# Altium PCB PCB1.PcbDoc
Units mm, origin at the board's own origin, x right, y up, seen from the top; angles counter-clockwise.
Board outline 50 x 30 mm, 4 copper layers (Top Layer, Layer 1, Layer 2, Bottom Layer), stack 0.603 mm thick; 56 components, 43 nets, 273 pads, 167 vias.
Unrouted connection lines stored in the file: 3.
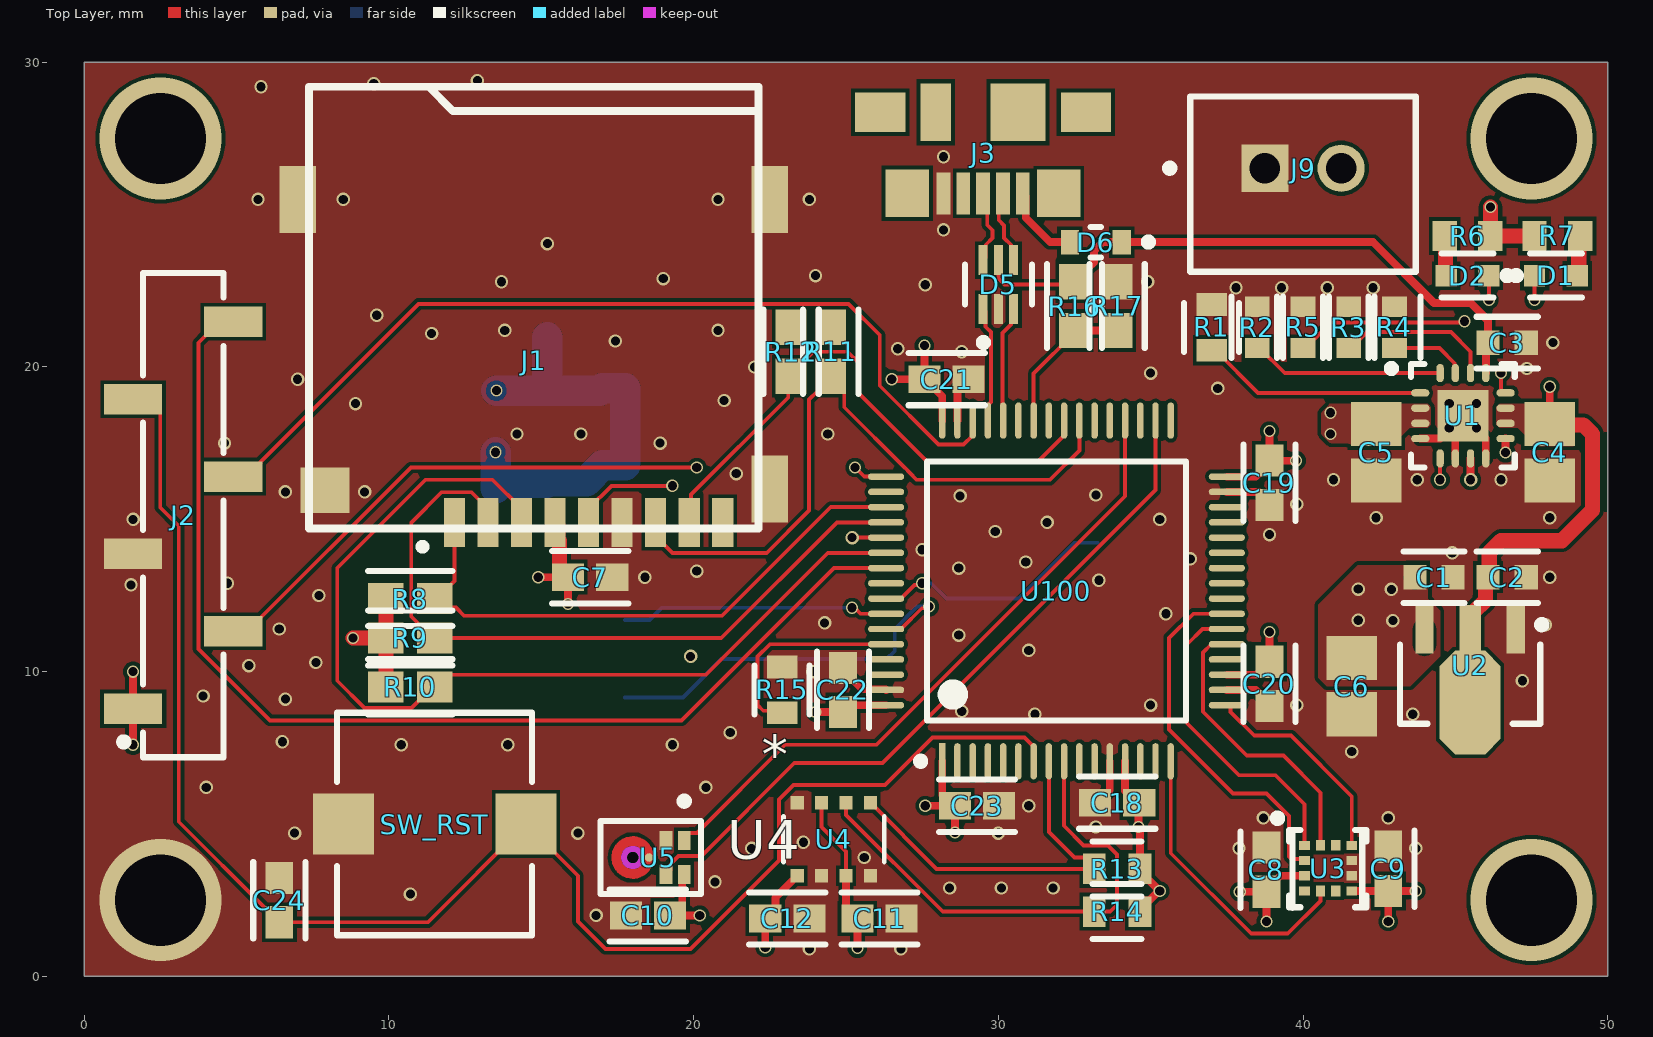
[diagram p0: Top Layer view]
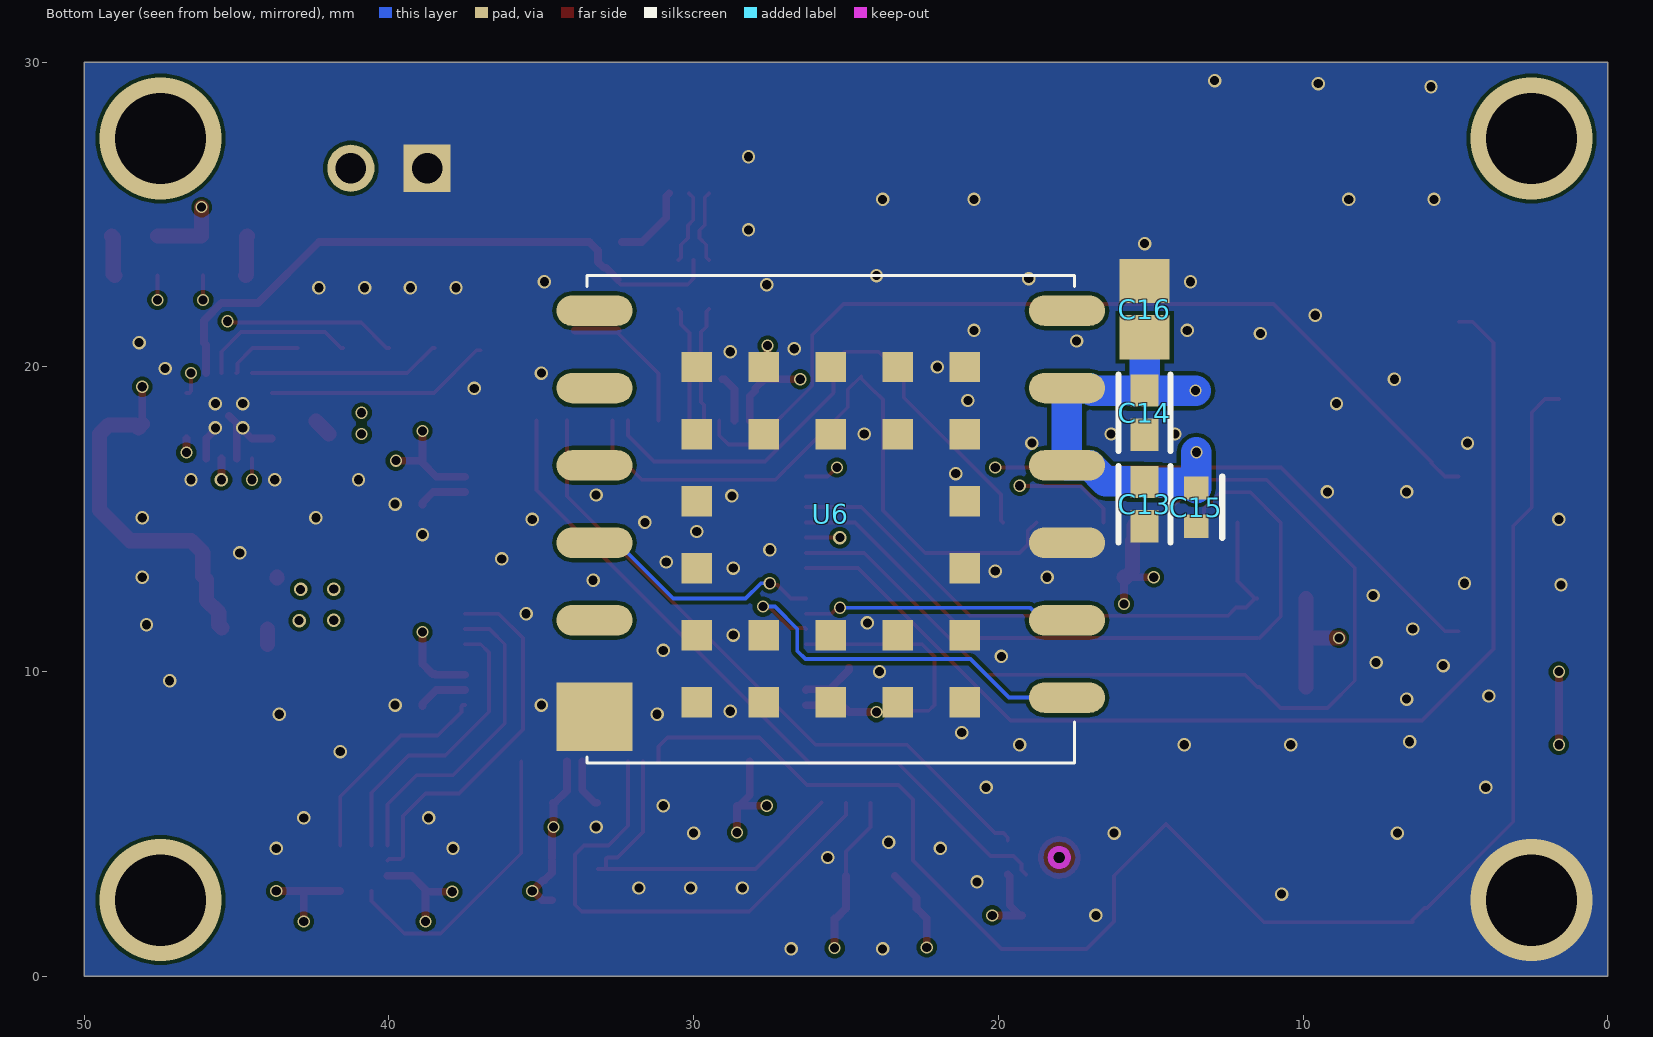
[diagram p1: Bottom Layer view, seen from below]
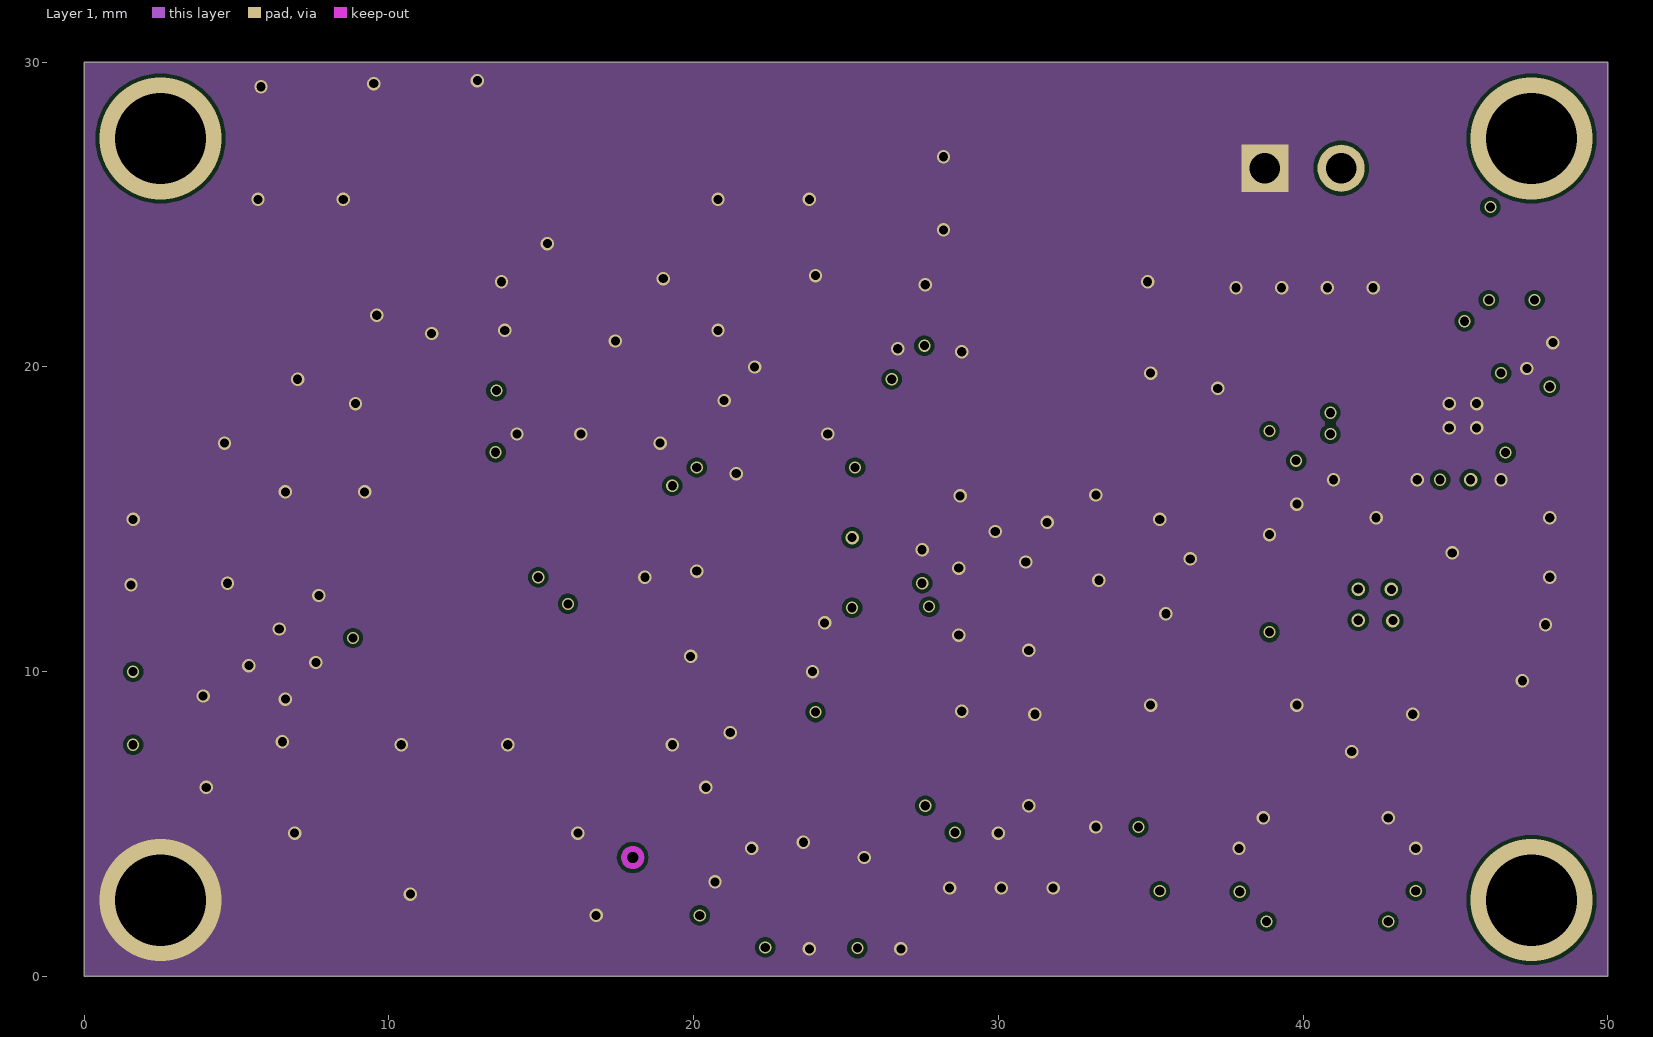
[diagram p2: Layer 1]
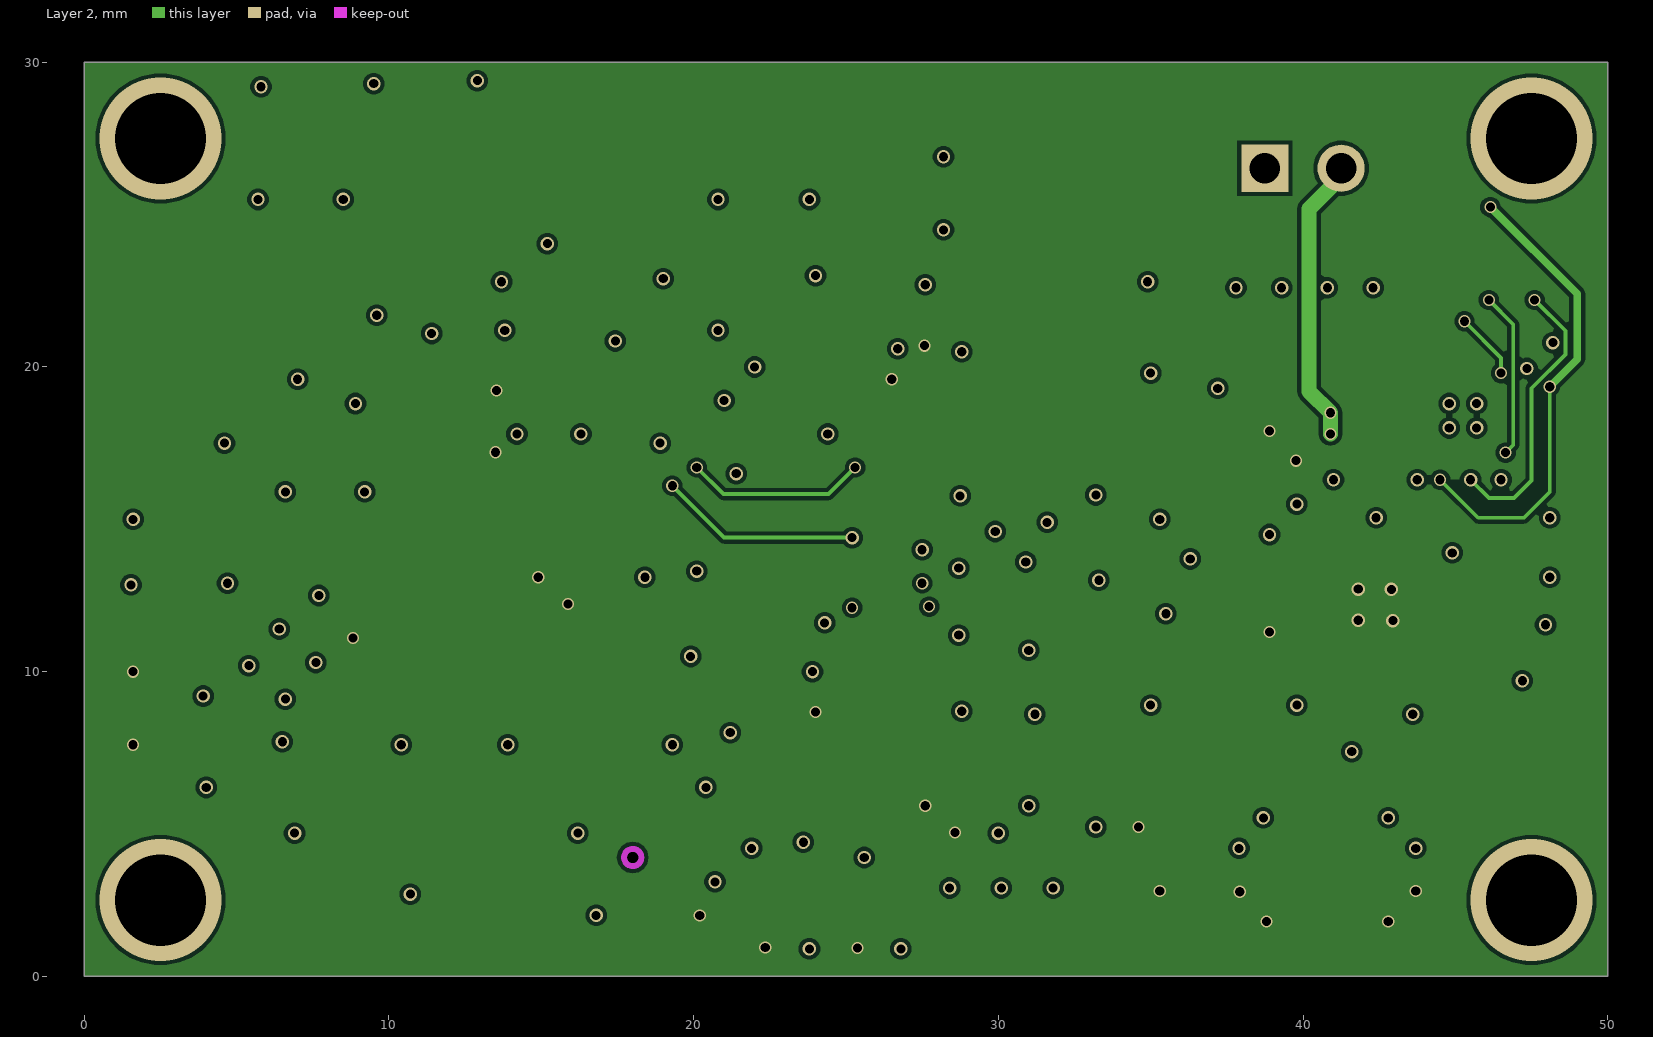
[diagram p3: Layer 2]
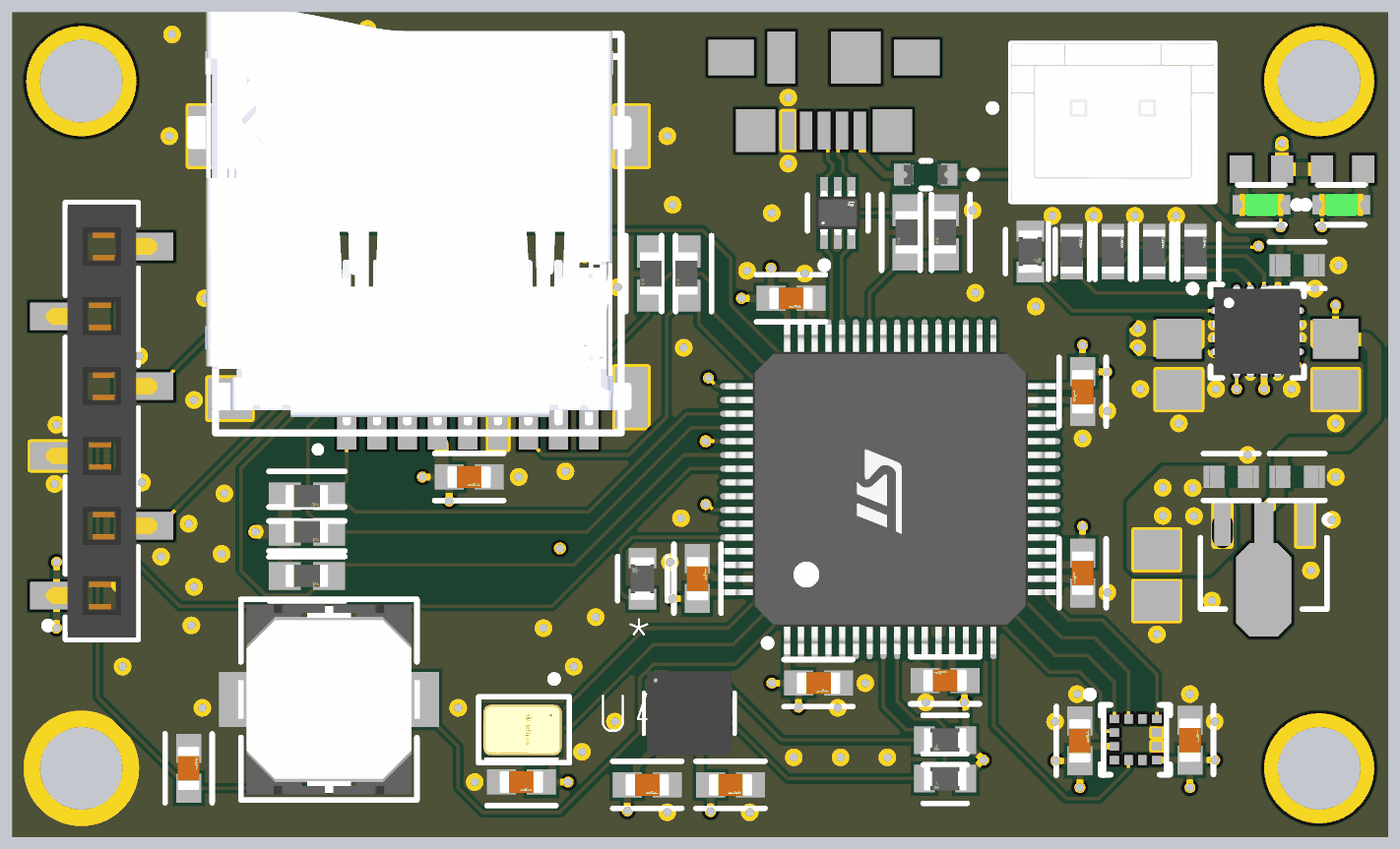
[diagram p4: 3D render of the assembled board from above, using the file's embedded part models]
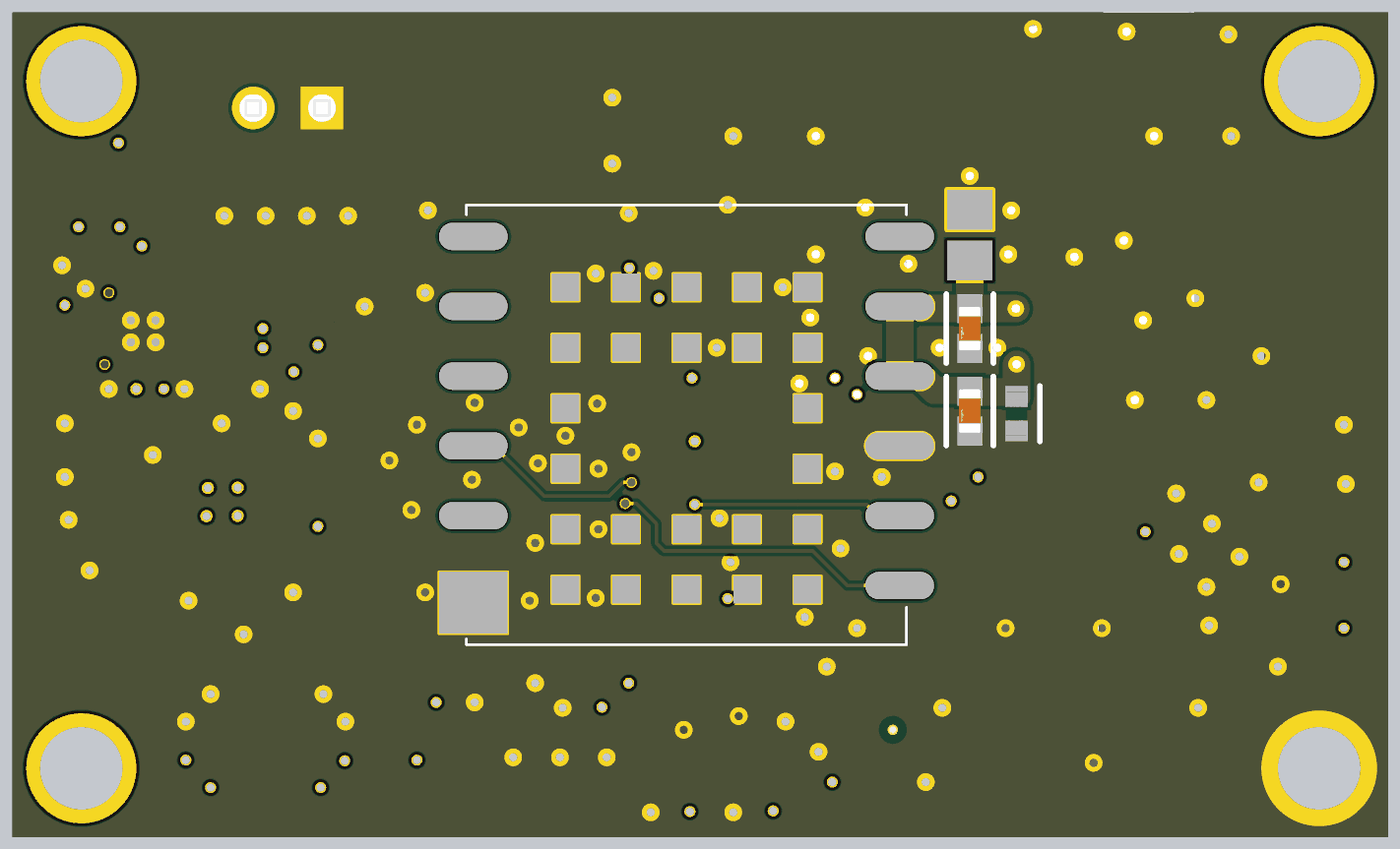
[diagram p5: 3D render of the assembled board from below, using the file's embedded part models]

## Layer stack, top to bottom
Top Solder: solder mask 0.0102, Solder Resist, Dk 3.5
Top Layer: signal copper 0.0356
Dielectric 2: prepreg 0.0711, PP-006, Dk 4.1
Layer 1: signal copper 0.035
Dielectric 1: dielectric 0.32, FR-4, Dk 4.8
Layer 2: signal copper 0.035
Dielectric 3: prepreg 0.0711, PP-006, Dk 4.1
Bottom Layer: signal copper 0.0356
Bottom Solder: solder mask 0.0102, Solder Resist, Dk 3.5

## Board outline
0,0 0,30 50,30 50,0

## Design rules (kind name [scope] priority, off if disabled: settings)
Clearance [All] p1: gap=0.127 ignorepadtopadclearanceinfootprint=TRUE except(0: SMDPad-SMDPad SMDPad-Via SMDPad-Hole)
ComponentClearance [All] p1 off: gap=0.254 collisioncheckmode=3 verticalgap=0.254 showdistances=FALSE
DiffPairsRouting [All] p1: maxlimit=0.254 minlimit=0.254 mostfreqgap=0.254 toplayer_minwidth=0.127 toplayer_maxwidth=0.381 toplayer_prefwidth=0.381 midlayer1_minwidth=0.381 midlayer1_maxwidth=0.381 midlayer1_prefwidth=0.381 midlayer2_minwidth=0.381 midlayer2_maxwidth=0.381 midlayer2_prefwidth=0.381 bottomlayer_minwidth=0.381 bottomlayer_maxwidth=0.381 bottomlayer_prefwidth=0.381 maxuncoupledlength=12.7
PlaneConnect [All] p1: planeconnectstyle=Direct reliefexpansion=0.508 reliefentries=4 reliefconductorwidth=0.254 reliefairgap=0.254
PolygonConnect [All] p1: connectstyle=Direct reliefconductorwidth=0.254 reliefentries=4 polygonreliefangle="90 Angle" airgapwidth=0.254
RoutingVias [All] p1: holewidth=0.3 width=0.4 viastyle="Through Hole" minholewidth=0.3 minwidth=0.4 maxholewidth=0.3 maxwidth=0.4
SolderMaskExpansion [All] p1: expansion=0.102 istentingtop=FALSE
SupplyNets "Schematic Supply Nets_4" [InNet('VBUS')] p1: voltage=0.000
SupplyNets "Schematic Supply Nets_3" [InNet('GND')] p2: voltage=0.000
SupplyNets "Schematic Supply Nets_2" [InNet('VBAT')] p3: voltage=0.000
SupplyNets "Schematic Supply Nets_1" [InNet('VCC')] p4: voltage=0.000
SupplyNets "Schematic Supply Nets" [InNet('+3.3V')] p5: voltage=0.000
Width [All] p1: maxlimit=1 minlimit=0.127 preferedwidth=0.254 minimp=50.000000 maximp=50.000000 favimp=50.000000
27 further rules are at their usual default settings.

## Classes and differential pairs
component class SENSORES: C8 C9 C10 C11 C12 C13 C14 C15 C16 R13 R14 U3 U4 U5 U6
component class CONTROL: C18 C19 C20 C21 C22 C23 C24 R15 SW_RST U100
component class CONECTORES: C7 D5 D6 J1 J2 J3 R8 R9 R10 R11 R12 R16 R17
component class ALIMENTACION: C1 C2 C3 C4 C5 C6 D1 D2 J9 R1 R2 R3 R4 R5 R6 R7 U1 U2
differential pair USB_PAR_TVS_USB: +NetD5_6 -NetD5_4
differential pair USB_PAR_MICRO_TVS: +NetD5_1 -NetD5_3

## Components (designator, comment, footprint, x,y, rotation, side; value= is the part's Value field where it differs from the comment)
C1 "1uF" FP-CL10-IPC_C 44.3,13.1 r0 top
C2 "1uF" FP-CL10-IPC_C 46.7,13.1 r0 top
C3 "1uF" FP-CL10-IPC_C 46.7,20.8 r0 top
C4 "4.7uF" CAPC2014X150X70ML20 48.1,17.2 r90 top
C5 "4.7uF" CAPC2014X150X70ML20 42.4,17.2 r90 top
C6 "4.7uF" CAPC2014X150X70ML20 41.6,9.525 r90 top
C7 "100nF" FP-GCG188-0_2-IPC_B 16.6,13.1 r0 top
C8 "100nF" FP-GCG188-0_2-IPC_B 38.8,3.5 r90 top
C9 "100nF" FP-GCG188-0_2-IPC_B 42.8,3.525 r90 top
C10 "100nF" FP-GCG188-0_2-IPC_B 18.5,2 r0 top
C11 "100nF" FP-GCG188-0_2-IPC_B 26.1,1.9 r0 top
C12 "100nF" FP-GCG188-0_2-IPC_B 23.075,1.9 r0 top
C13 "100nF" FP-GCG188-0_2-IPC_B 15.2,15.5 r270 bottom
C14 "100nF" FP-GCG188-0_2-IPC_B 15.2,18.5 r270 bottom
C15 "1uF" FP-CL10-IPC_C 13.5,15.4 r270 bottom
C16 "4.7uF" CAPC2014X150X70ML20 15.2,21.9 r270 bottom
C18 "100nF" FP-GCG188-0_2-IPC_B 33.9,5.7 r180 top
C19 "100nF" FP-GCG188-0_2-IPC_B 38.9,16.2 r270 top
C20 "100nF" FP-GCG188-0_2-IPC_B 38.9,9.6 r270 top
C21 "100nF" FP-GCG188-0_2-IPC_B 28.3,19.6 r0 top
C22 "100nF" FP-GCG188-0_2-IPC_B 24.9,9.4 r90 top
C23 "100nF" FP-GCG188-0_2-IPC_B 29.3,5.6 r0 top
C24 "100nF" FP-GCG188-0_2-IPC_B 6.4,2.5 r90 top
D1 "LSM0603453V" FP-LSM0603453V-MFG 48.3,23 r0 top
D2 "LSM0603453V" FP-LSM0603453V-MFG 45.4,23 r180 top
D5 "USBLC6-2P6" FP-SOT-666-MFG 30,22.705 r90 top
D6 "CD0603-B0240R" FP-CD0603-MFG 33.2,24.1 r180 top value=35pF
J1 "microSD_MSD4" ConnectorMicroSD_msd4 23.1,26.6 r180 top
J2 "61000611921" 61000611921 3.244,15.135 r90 top
J3 "USB" ConnectorMicroUSB 29.5,25.7 r180 top
J9 "B2B-XH-A(LF)(SN)" FP-B2B-XH-A_LF_SN-MFG 40,26 r0 top
R1 "10k" FP-CRCW0603-HPe3-MFG 37,21.3 r270 top
R2 "3.3k" FP-AC0603-IPC_C 38.5,21.3 r90 top
R3 "3.3k" FP-AC0603-IPC_C 41.5,21.3 r90 top
R4 "3.3k" FP-AC0603-IPC_C 43,21.3 r90 top
R5 "3.3k" FP-AC0603-IPC_C 40,21.3 r90 top
R6 "1.5k" RESC1608X55X25ML10T15 45.4,24.3 r180 top
R7 "1.5k" RESC1608X55X25ML10T15 48.35,24.3 r0 top
R8 "47k" FP-TFCR0603-IPC_A 10.7,12.4 r180 top
R9 "47k" FP-TFCR0603-IPC_A 10.7,11.106 r180 top
R10 "47k" FP-TFCR0603-IPC_A 10.7,9.5 r180 top
R11 "47k" FP-TFCR0603-IPC_A 24.5,20.5 r90 top
R12 "47k" FP-TFCR0603-IPC_A 23.2,20.5 r90 top
R13 "10k" FP-CRCW0603-HPe3-MFG 33.9,3.526 r180 top
R14 "10k" FP-CRCW0603-HPe3-MFG 33.9,2.126 r180 top
R15 "10k" FP-CRCW0603-HPe3-MFG 22.9,9.4 r90 top
R16 "47k" FP-TFCR0603-IPC_A 32.5,22 r90 top
R17 "47k" FP-TFCR0603-IPC_A 33.9,22 r90 top
SW_RST "B3AL-1003P" FP-B3AL-1003P-MFG 11.5,5 r0 top
U1 "BQ24232HA" QFN50P300X300X100_HS-17N 45.25,18.4 r0 top
U2 "MCP1703AT-3302E/MB" MCHP-SOT-89-MB3_M 45.486,9.739 r270 top
U3 "BMA400" LGA-12 40.05,4.3 r270 top
U4 "BME680" LGA8_BME680_BOS 24.6,4.5 r0 top
U5 "IM66D130MV01" IFX-PG-TLGA-5-8 18.845,3.9 r270 top
U6 "LC86G" LD86G 24.484,14.746 r0 bottom
U100 "STM32L476RGT3" FP-LQFP64-5W-IPC_C 31.909,12.65 r90 top

## Footprints (in the part's own frame and the unit in brackets; to place one, negate y for a bottom-side part, rotate by r counter-clockwise, add the part's x,y. Pads: shape width x height; smd on the part's side, far side on the other; paste and mask are expansions set on the pad)
61000611921 [mm] "Socket Header, Pitch 2.54 mm, SMT, Vertical, single row, 6p"
  rect 1x1.91 smd: 1(-6.35,1.645) 2(-3.81,-1.645) 3(-1.27,1.645) 4(1.27,-1.645) 5(3.81,1.645) 6(6.35,-1.645)
  silkscreen extent -7.95,-1.33 7.95,2.07, body extent -7.87,-2.03 7.87,2.02, height 7.5
CAPC2014X150X70ML20 [mm] "Chip Capacitor, 2-Leads, Body 2.00x1.35mm, IPC Low Density"
  rect 1.45x1.65 smd: 1(-0.925,0) 2(0.925,0)
  body extent -1.1,-0.77 1.1,0.77, height 1.5
ConnectorMicroSD_msd4 [mm]
  rect 0.7x1.6 smd: 1(10.95,11.7) 2(9.85,11.7) 3(8.75,11.7) 4(7.65,11.7) 5(6.55,11.7) 6(5.45,11.7) 7(4.35,11.7) 8(3.25,11.7) CD(2.15,11.7)
  rect 1.2x2.2 smd: GND(0.6,10.6) GND(0.6,1.1) GND(16.1,1.1)
  rect 1.6x1.5 smd: GND(15.2,10.65)
  silkscreen extent 0.98,-2.6 15.73,12.6, body extent 0.6,-3.42 16.75,11.62, height 1.8
ConnectorMicroUSB [mm]
  rect 0.45x1.38 smd: 1(-1.3,0) 2(-0.65,0) 3(0,0) 4(0.65,0) 5(1.3,0)
  rect 1.425x1.55 smd: S1(-2.488,0) S2(2.488,0)
  rect 1.65x1.3 smd: S3(-3.375,-2.66) S6(3.375,-2.66)
  rect 1.8x1.9 smd: S4(-1.15,-2.66)
  rect 1x1.9 smd: S5(1.55,-2.66)
FP-AC0603-IPC_C [mm]
  rect 0.659x0.812 smd paste+0 mask+0: 1(-0.677,0) 2(0.677,0)
  silkscreen extent -1.01,-0.85 1.01,0.85, body extent -1.11,-0.55 1.11,0.55, height 0.25
FP-B2B-XH-A_LF_SN-MFG [mm]
  rect 1.55x1.55 hole 1 paste-2539.97 mask+0: 1(-1.25,0.525)
  round 1.55 hole 1 paste-2539.97 mask+0: 2(1.25,0.525)
  silkscreen extent -4.5,-2.88 3.7,2.88, body extent -3.8,-2.98 3.8,2.98, height 0.25
FP-B3AL-1003P-MFG [mm]
  rect 2x2 smd paste+0 mask+0: 1(-3,0) 2(3,0)
  silkscreen extent -3.2,-3.65 3.2,3.65, body extent -4.1,-3.75 4.1,3.75, height 0.25
FP-CD0603-MFG [mm]
  rect 0.6x0.8 smd paste+0 mask+0: 1(-0.85,0) 2(0.85,0)
  silkscreen extent -1.85,-0.5 0.18,0.5, body extent -1.25,-0.6 1.25,0.6, height 0.25
FP-CL10-IPC_C [mm]
  rect 0.758x0.812 smd paste+0 mask+0: 1(-0.627,0) 2(0.627,0)
  silkscreen extent -1.01,-0.85 1.01,0.85, body extent -1.11,-0.55 1.11,0.55, height 0.25
FP-CRCW0603-HPe3-MFG [mm]
  rect 0.75x1 smd paste+0 mask+0: 1(-0.75,0) 2(0.75,0)
  silkscreen extent -0.8,-0.9 0.8,0.9, body extent -1.22,-0.6 1.22,0.6, height 0.25
FP-GCG188-0_2-IPC_B [mm]
  rect 1.055x0.912 smd paste+0 mask+0: 1(-0.725,0) 2(0.725,0)
  silkscreen extent -1.25,-0.86 1.25,0.86, body extent -1.5,-0.71 1.5,0.71, height 0.25
FP-LQFP64-5W-IPC_C [mm]
  rect 1.188x0.212 smd paste+0 mask+0: 1(-5.591,3.75)
  rrect100% 1.188x0.212 smd paste+0 mask+0: 2(-5.591,3.25) 3(-5.591,2.75) 4(-5.591,2.25) 5(-5.591,1.75) 6(-5.591,1.25) 7(-5.591,0.75) 8(-5.591,0.25) 9(-5.591,-0.25) 10(-5.591,-0.75) 11(-5.591,-1.25) 12(-5.591,-1.75) 13(-5.591,-2.25) 14(-5.591,-2.75) 15(-5.591,-3.25) 16(-5.591,-3.75) 33(5.591,-3.75) 34(5.591,-3.25) 35(5.591,-2.75) 36(5.591,-2.25) 37(5.591,-1.75) 38(5.591,-1.25) 39(5.591,-0.75) 40(5.591,-0.25) 41(5.591,0.25) 42(5.591,0.75) 43(5.591,1.25) 44(5.591,1.75) 45(5.591,2.25) 46(5.591,2.75) 47(5.591,3.25) 48(5.591,3.75)
  rrect100% 0.212x1.188 smd paste+0 mask+0: 17(-3.75,-5.591) 18(-3.25,-5.591) 19(-2.75,-5.591) 20(-2.25,-5.591) 21(-1.75,-5.591) 22(-1.25,-5.591) 23(-0.75,-5.591) 24(-0.25,-5.591) 25(0.25,-5.591) 26(0.75,-5.591) 27(1.25,-5.591) 28(1.75,-5.591) 29(2.25,-5.591) 30(2.75,-5.591) 31(3.25,-5.591) 32(3.75,-5.591) 49(3.75,5.591) 50(3.25,5.591) 51(2.75,5.591) 52(2.25,5.591) 53(1.75,5.591) 54(1.25,5.591) 55(0.75,5.591) 56(0.25,5.591) 57(-0.25,5.591) 58(-0.75,5.591) 59(-1.25,5.591) 60(-1.75,5.591) 61(-2.25,5.591) 62(-2.75,5.591) 63(-3.25,5.591) 64(-3.75,5.591)
  silkscreen extent -5.72,-4.25 4.25,4.58, body extent -6,-6 6,6, height 1.6
FP-LSM0603453V-MFG [mm]
  rect 0.7x0.7 smd paste+0 mask+0: 1(-0.7,0) 2(0.7,0)
  silkscreen extent -1.72,-0.72 0.85,0.72, body extent -1.15,-0.55 1.15,0.55, height 0.25
FP-SOT-666-MFG [mm]
  rect 0.99x0.3 smd paste+0 mask+0: 1(-0.805,0.5) 2(-0.805,0) 3(-0.805,-0.5) 4(0.805,-0.5) 5(0.805,0) 6(0.805,0.5)
  silkscreen extent -2.02,-1.1 0.65,1.1, body extent -1.4,-0.95 1.4,0.95, height 0.25
FP-TFCR0603-IPC_A [mm]
  rect 1.158x1.012 smd paste+0 mask+0: 1(-0.802,0) 2(0.802,0)
  silkscreen extent -1.38,-0.91 1.38,0.91, body extent -1.88,-1.01 1.88,1.01, height 0.25
IFX-PG-TLGA-5-8 [mm] "Microphone, SMD, 5 pin, 2.00 mm L X 3.00 mm W X 1.06 mm H body"
  rect 0.625x0.42 smd paste-0.21 mask+0: 1(-0.555,0.845) 2(-0.555,0.245) 4(0.555,0.245) 5(0.555,0.845)
  round 0.28 smd paste-0.14 mask-0.14: 3(0,-0.31)
  round 0 hole 0.375 unplated paste-2539.97 mask+0: ""(0,-0.845)
  Top Layer circle w0.32: c0,-0.845 r0.54
  Keep-Out Layer circle w0.192: c0,-0.845 r0.284
  silkscreen extent -1.97,-1.9 1.2,1.4, body extent -1,-1.8 1,1.2, height 1.06
LD86G [mm]
  oval 2.5x1 smd mask+0.05: 1(-6.734,5.596) 2(-6.734,3.056) 3(-6.734,0.516) 4(-6.734,-2.024) 5(-6.734,-4.564) 6(-6.734,-7.104) 7(8.766,-7.104) 8(8.766,-4.564) 9(8.766,-2.024) 10(8.766,0.516) 11(8.766,3.056)
  rect 2.5x2.25 smd mask+0.05: 12(8.766,6.221)
  rect 1x1 smd mask+0.05: 13(-3.384,5.746) 14(-1.184,5.746) 15(1.016,5.746) 16(3.216,5.746) 17(5.416,5.746) 18(-3.384,3.546) 19(-1.184,3.546) 20(1.016,3.546) 21(3.216,3.546) 22(5.416,3.546) 23(-3.384,1.346) 24(5.416,1.346) 25(-3.384,-0.854) 26(5.416,-0.854) 27(-3.384,-3.054) 28(-1.184,-3.054) 29(1.016,-3.054) 30(3.216,-3.054) 31(5.416,-3.054) 32(-3.384,-5.254) 33(-1.184,-5.254) 34(1.016,-5.254) 35(3.216,-5.254) 36(5.416,-5.254)
  silkscreen extent -6.98,-8.25 9.02,7.75, body extent -6.98,-8.25 9.02,7.75, height 6.98
LGA8_BME680_BOS [mil]
  rect 17x17 smd paste+0 mask+0: 1(-47.21,47.24) 2(-15.75,47.21) 3(15.75,47.21) 4(47.21,47.24) 5(47.21,-47.24) 6(15.75,-47.21) 7(-15.75,-47.21) 8(-47.21,-47.24)
  silkscreen extent -65,-30 65,30, body extent -60,-60 60,60, height 39
LGA-12 [mm]
  rect 0.3x0.35 smd: 1(0,0) 2(0.5,0) 3(1,0) 4(1.5,0) 7(1.5,1.55) 8(1,1.55) 9(0.5,1.55) 10(0,1.55)
  rect 0.35x0.3 smd: 5(1.5,0.525) 6(1.5,1.025) 11(0,1.025) 12(0,0.525)
  silkscreen extent -1.02,-1.02 2.03,2.03, body extent -0.28,-0.28 1.78,1.83
MCHP-SOT-89-MB3_M [mm] "SOT89, 3-Leads, Body 4.5x2.45mm, Pitch 1.5mm, IPC Low Density"
  rect 1.6x0.6 smd: 1(-1.65,1.5) 3(-1.65,-1.5)
  rect 1.5x0.7 smd: 2(-1.7,0)
  oct 3.4x2 smd: 4(0.75,0)
  silkscreen extent -1.93,-2.3 1.45,2.48, body extent -1.15,-2.3 1.45,2.3, height 1.6
QFN50P300X300X100_HS-17N [mm] "QFN, 16-Leads, Body 3,00x3,00mm, Pitch 0,50mm, Thermal Pad 1,68x1,68mm, IPC Medium Density"
  oval 0.6x0.24 smd: 1(-1.4,0.75) 2(-1.4,0.25) 3(-1.4,-0.25) 4(-1.4,-0.75) 9(1.4,-0.75) 10(1.4,-0.25) 11(1.4,0.25) 12(1.4,0.75)
  oval 0.24x0.6 smd: 5(-0.75,-1.4) 6(-0.25,-1.4) 7(0.25,-1.4) 8(0.75,-1.4) 13(0.75,1.4) 14(0.25,1.4) 15(-0.25,1.4) 16(-0.75,1.4)
  rect 1.68x1.68 smd: 17(0,0)
  silkscreen extent -2.47,-1.7 1.7,1.7, body extent -1.6,-1.6 1.6,1.6, height 1
RESC1608X55X25ML10T15 [mm] "Chip Resistor, 2-Leads, Body 1.60x0.80mm, IPC Low Density"
  rect 0.8x1 smd: 1(-0.75,0) 2(0.75,0)
  body extent -0.85,-0.45 0.85,0.45, height 0.55

## Part data
C1 C2 C3 C15: library part CMP-13271-002188-1, "Cap Ceramic 1uF 16V X7R ±10% Pad SMD 0603 +125°C T/R", Case Code (Imperial)=0603, Case Code (Metric)=1608, Dielectric=X7R, Max Operating Temperature=125°C, Min Operating Temperature=-55°C, Ratings=AEC-Q200, Tolerance=10%, Voltage Rating=16V, Capacitance=1uF, Case/Package=0603, Depth=0.8mm, Features="Soft Termination", Lead Free="Lead Free", Length=0.063inch, Mount="Surface Mount", Packaging="Tape and Reel", Thickness=0.035inch, Width=0.031inch
C4 C5 C6 C16: library part CMP-2007-00037-1, Manufacturer="AVX Interconnect / Elco", Part Number=TACR475M010RTA
C7 C8 C9 C10 C11 C12 C13 C14 C18 C19 C20 C21 C22 C23 C24: library part CMP-06035-011350-1, "AgPd Termination Conductive Glue Mounting Chip Multilayer Ceramic Capacitors for Automotive 0.1uF with 20% as tolerance, 50V X8R 15%, 0603 Package"
D1 D2: library part CMP-00731-94024739-1, "LSM0603453V LED SM 0603 3V -/1000/-mcd Green", Case/Package=0603, Color=Green, Forward Current=20mA, Forward Voltage=2.3V, Max Operating Temperature=85°C, Min Operating Temperature=-40°C, Power Dissipation=60mW, Reverse Voltage=5V, Height=550µm, Luminous Intensity=120mcd, NexarPartId=94024739, Schedule B="8541402000, 8541406050", Viewing Angle=120°, Wavelength=576nm
D5: library part CMP-12225-000058-1, "TVS DIODE 5.25V 17V SOT666", Breakdown Voltage=6V, Capacitance=3.5pF, Case/Package=SOT-666, Clamping Voltage=17V, Leakage Current=150nA, Max Operating Temperature=125°C, Min Operating Temperature=-40°C, Operating Supply Voltage=5V, Package Quantity=1, Peak Pulse Current=5A, Power Line Protection=Yes, Test Current=1mA, Contact Plating=Tin, Depth=1.3mm, Direction=Unidirectional, Element Configuration=Dual, ESD Protection=Yes, Height=0.6mm, Lead Free="Lead Free", Length=1.7mm, Max Breakdown Voltage=6V, Max Reverse Leakage Current=150nA, Min Breakdown Voltage=6V, Mount="Surface Mount", Number of Bidirectional Channels=2, Number of Channels=2, Number of Elements=1, Number of Pins=6, Packaging="Tape and Reel", Polarity=Unidirectional, Radiation Hardening=No, REACH SVHC="No SVHC", Reverse Breakdown Voltage=6V, Reverse Standoff Voltage=5V, Termination=SMD/SMT, Width=1.3mm, Working Voltage=5V
D6: library part CMP-07363-000001-1, "DIODE SCHOTTKY 40V 200MA 0603", Capacitance=35pF, Forward Current=200mA, Manufacturer=Bourns, Max Junction Temp=+125°C, Max Repetitive Reverse Voltage=40V, Max Surge Forward Current=2A, Package=CD0603, Peak Reverse Current=0.5uA, Temperature="-40°C to +125°C", Temperature Range Low=-40°C, Automotive=No, Category=Diode, ComponentLink2Description=Datasheet, ComponentLink2URL=https://bourns.com/data/global/pdfs/CD0603-B.pdf, Device Class L1="Discrete Semiconductors", Device Class L2=Diodes, Device Class L3="Schottky Diodes", Digikey Description="DIODE SCHOTTKY 40V 200MA 0603", Height=0.86mm, Lead Free=Yes, Manufacturer Part Number=CD0603-B0240R, Mouser Description="Diode Small Signal Schottky 40V 0.2A Automotive 2-Pin Case 0603(1608Metric) T/R", Octopart=https://octopart.com/cd0603-b0240r-bourns-87497736, RoHS=TRUE, Standoff Height=0.03mm, Temperature Range High=+125°C
J2: library part CMP-1502-01270-4, "SMT Vertical Socket Header WR-PHD, Pitch 2.54 mm, Single Row, 6 pins", Contact Resistance=20mΩ, Current Rating=3A, Operating Supply Voltage=250V, Gender=Female, Lead Pitch=2.54mm, Number of Pins=6, Orientation=Vertical, RoHS=Non-Compliant
J9: library part CMP-2000-05888-3, "CONN HEADER VERT 2POS 2.5MM", Color=Natural, Contact Resistance=20mR, Current Rating=3A, Housing Color=White, Insulation Resistance=1GR, Max Operating Temperature=85°C, Max Voltage Rating (AC)=250V, Min Operating Temperature=-25°C, Connector Type="Male Pin", Contact Material=Brass, Contact Plating=Tin, Contact Type="Male Pin", Depth=5.75mm, Fastening Type=Detent, Housing Material=Polyamide, Lead Free="Lead Free", Lead Pitch=2.5mm, Length=7.4mm, Max Current Rating=3A, Max Voltage Rating (DC)=250V, Mount="Through Hole", Number of Contacts=2, Number of Positions=2, Number of Rows=1, Orientation=Straight, Packaging=Bulk, Pitch=2.5mm, REACH SVHC="No SVHC", Series=XH, Termination=Solder, Voltage Rating=250V, Voltage Rating (AC)=250V, Wire/Cable Gauge=22AWG
R1 R13 R14 R15: library part CMP-2000-03835-2, "RES SMD 10K OHM 1% 1/3W 0603", Case Code (Imperial)=0603, Case Code (Metric)=1608, Max Operating Temperature=155°C, Max Power Dissipation=250mW, Min Operating Temperature=-55°C, Package Quantity=10, Resistance=10kR, Temperature Coefficient=100ppm/°C, Tolerance=1%, Voltage Rating=75V, Case/Package=0603, Composition="Thick Film", Contact Plating=Tin, Depth=0.85mm, Features="Automotive AEC-Q200", Height=0.45mm, Lead Free="Lead Free", Length=1.6mm, Military Standard=Not, Number of Terminations=2, Packaging="Tape and Reel", Power Rating=250mW, Radiation Hardening=No, Termination=SMD/SMT, Voltage Rating (DC)=75V, Weight=7.1E-05oz, Width=0.033inch
R2 R3 R4 R5: library part CMP-03412-041670-1, "RES 3.3kΩ 1.00% 0.2W 0603", RoHS Compliant=Yes
R6 R7: library part CMP-2000-04319-1, Manufacturer=Yageo, Part Number=RC0603JR-131K5L
R8 R9 R10 R11 R12 R16 R17: library part CMP-250906-272076-1, "RES Thin Film,  47kΩ, 1%, 0.1W, 100ppm/°C, 0603"
SW_RST: library part CMP-08834-000018-1, "SWITCH TACTILE SPST-NO 0.05A 16V", Actuator Color=White, Contact Current Rating=50mA, Contact Resistance=100mR, Max Operating Temperature=90°C, Max Voltage Rating (DC)=16V, Min Operating Temperature=-40°C, Operating Force=3.5N, Package Quantity=1, Contact Plating=Silver, Current Rating=50mA, Depth=6.6mm, Electrical Life=1000000Cycles, Illumination Type=Non-Illuminated, Length=6.9mm, Max Current Rating=50mA, Mechanical Life=1000000Cycles, Mount="Surface Mount", Orientation=Straight, Packaging="Tape and Reel", Radiation Hardening=No, RoHS Compliant=Yes, Series=B3AL, Switch Function=Off-Mom, Switch Travel=1.3mm, Termination=SMD/SMT, Throw Configuration=SPST, Voltage Rating (DC)=16V, Weight=0.18g
U1: "USB-Friendly Lithium-Ion Battery Charger and Power-Path Management IC", ComponentLink1Description="New link", ComponentLink1URL=https://www.mouser.es/ProductDetail/Texas-Instruments/BQ24232HARGTR?qs=zEmsApcVOkUhMNqBs2s9Ww%3D%3D
U2: library part CMP-0136-01169-1, "250 mA, 16V, Low Quiescent Current LDO Regulator, -40 to 125 degC, 3-pin SOT-89 (MB3), Tape and Reel", Manufacturer=Microchip, ComponentLink1Description="Manufacturer URL", ComponentLink1URL=http://www.microchip.com, ComponentLink2Description=Datasheet, ComponentLink2URL=http://ww1.microchip.com/downloads/en/DeviceDoc/25122A.pdf, ComponentLink3Description="Package Specification", ComponentLink3URL=http://www.microchip.com/stellent/groups/techpub_sg/documents/packagingspec/en012702.pdf, ComponentLink4Description="Product URL", ComponentLink4URL=http://www.microchip.com/MCP1703A, DatasheetVersion="Rev. A", Mounting Technology="Surface Mount", PackageDescription="3-Lead Plastic Small Outline Transistor Header, 4.5 x 2.45 mm Body, 1.5 mm Pitch", PackageReference=SOT-89-MB3, PackageVersion=C04-029B, PartNumber=MCP1703AT-3302E/MB
U4: "Description", Manufacturer_Name="Bosch Sensortec", Copyright="Copyright (C) 2025 Ultra Librarian. All rights reserved.", Manufacturer_Part_Number=BME680, RefDes=RefDes, Type=Type
U100: library part CMP-12105-000133-1, "IC MCU 32BIT 1MB FLASH 64LQFP", Case/Package=LQFP, Frequency=80MHz, Max Operating Temperature=125°C, Min Operating Temperature=-40°C, Core Architecture=ARM, Interface=I2C, Memory Size=1MB, Memory Type=FLASH, Number of I/Os=51, Oscillator Type=Internal, Packaging=Tray, Peripherals="Brown-out Detect/Reset"

## Via types
v1: diameter 0.44, hole 0.3, Top Layer to Bottom Layer, 123 vias
v2: diameter 0.4, hole 0.3, Top Layer to Bottom Layer, 40 vias
v3: diameter 4, hole 3, Top Layer to Bottom Layer, 4 vias

## Nets (pads, with @x,y where several pads share a name; then routed paths per layer and width w, separated by ;. In a path a pad name is that pad's centre, name@x,y a point inside that pad or via, vN(x,y) a via of type N, cw(c..) or ccw(c..) an arc to the next point about the centre after c; other vN are vias at no path point)
+3.3V: C1.1 C6.2 C7.1 C8.1 C9.1 C10.2 C11.1 C12.1 C13.1 C14.1 C15.1 C16.2 C18.1 C19.1 C20.1 C21.1 C22.1 C23.1 J1.4 J2.1 R8.2 R9.2 R10.2 R11.2 R12.2 R13.1 R14.1 U2.3 U3.3 U3.7 U4.2 U4.6 U4.8 U5.5 U6.4 U6.5 U100.1 U100.13 U100.19 U100.32 U100.48 U100.64 | length 63.4
  Top Layer w0.127: U4.2 24.2,4.9 25,4.1 U4.6
  Top Layer w0.254: v2(1.6,7.6) J2.1@1.6,8.784 ; J2.1 v2(1.6,10) ; v2(14.9,13.1) C7.1 v2(15.875,12.225) ; C10.2 v2(20.2,2) ; C10.2@19.297,2 19.626,2.329 19.626,3.281 U5.5 ; v2(22.349,0.951) C12.1 ; C12.1@22.353,1.9 22.682,2.229 22.682,2.581 U4.8 ; v2@23.975,8.7 v2(24,8.675) C22.1 25.125,8.9 U100.64 ; U4.6 25,2.229 25.329,1.9 C11.1 v2(25.375,0.925) ; v2(26.5,19.6) C21.1 v2(27.575,20.7) v2@27.6,20.7 ; v2(27.6,5.6) C23.1 ; C21.1@27.675,19.6 27.975,19.299 27.975,19.225 28.159,19.041 U100.48 ; U100.1 28.159,5.944 28.503,5.6 C23.1 ; v2(28.575,4.725) C23.1 ; U100.13 34.159,6.095 34.554,5.7 C18.1 34.6,5.675 v2(34.6,4.9) 34.6,4.86 34.65,4.81 R13.1@34.65,3.9 ; R14.1@34.65,2.5 34.96,2.5 35.26,2.8 v2(35.3,2.8) 34.947,3.153 34.898,3.153 R13.1@34.65,3.401 ; R13.1 R13.1@34.65,3.401 ; R13.1@34.65,3.775 R13.1@34.65,3.401 ; U100.19 38.475,9.9 38.499,9.925 38.571,9.925 38.9,10.254 C20.1 v2(38.9,11.3) ; U100.32 38.446,16.4 38.9,16.854 C19.1 ; v2(37.925,2.775) C8.1 v2(38.8,1.8) ; C8.1@38.8,2.846 39.254,3.3 U3.3 ; v2(38.9,17.9) C19.1 ; v2(39.775,16.925) C19.1 ; U3.7 C9.1 ; v2(42.8,1.8) C9.1 ; v2(43.7,2.8) C9.1
  Top Layer w0.5: v2(8.819,11.106) R9.2 ; R10.2 R9.2 ; R8.2 R9.2 ; J1.4 15.55,14.8 15.55,14.35 15.6,14.3 15.6,13.306 15.806,13.1 C7.1 ; C1.1@43.673,13.073 C1.1 ; U2.3@43.986,10.889 U2.3
  Bottom Layer w1: v2(13.5,17.2) C15.1 13.671,16.198 15.172,16.198 C13.1 15.228,16.253 16.483,16.253 17,16.77 U6.4 U6.5 17,19.31 16.915,19.225 C14.1 ; v2(13.525,19.225) C14.1 ; C16.2 C14.1
  other v1: 41.814,11.686 42.95,11.675 41.814,12.711 42.9,12.7
GND: C1.2 C2.2 C3.2 C4.1 C5.1 C6.1 C7.2 C8.2 C9.2 C10.1 C11.2 C12.2 C13.2 C14.2 C15.2 C16.1 C18.2 C19.2 C20.2 C21.2 C22.2 C23.2 C24.2 D5.2 J1.6 J1.GND J2.3 J3.5 J9.1 R1.1 R2.2 R3.2 R4.2 R5.2 R15.2 R17.2 SW_RST.1 U1.4 U1.6 U1.8 U1.17 U2.1 U3.8 U3.9 U4.1 U4.5 U4.7 U5.2 U5.3 U6.3 U6.12 U6.13 U6.14 U6.15 U6.16 U6.17 U6.18 U6.19 U6.20 U6.21 U6.22 U6.23 U6.24 U6.25 U6.26 U6.27 U6.28 U6.29 U6.30 U6.31 U6.32 U6.33 U6.34 U6.35 U6.36 U100.12 U100.18 U100.31 U100.47 U100.63 | length 11.9
  Top Layer w0.254: C22.2 24.9,10.054 25.533,9.421 26.297,9.421 U100.63 ; U100.47 28.659,19.271 28.988,19.6 C21.2@29.054,19.6 ; C18.2 33.246,5.7 33.659,6.113 U100.12 ; U100.18 38.446,9.4 38.9,8.946 C20.2 ; U100.31 38.546,15.9 38.9,15.546 C19.2 ; U1.4 44.5,17.65 44.8,17.95 v1(44.8,18) ; U1.6 45,18.15 U1.17 ; U1.17@45.7,17.95 46,17.65 U1.8
  other v1: 23.8,0.9 26.8,0.9 16.8,2 10.7,2.7 28.4,2.9 30.1,2.9 31.8,2.9 20.7,3.1 25.6,3.9 21.9,4.2 37.9,4.2 43.7,4.2 23.6,4.4 6.9,4.7 16.2,4.7 30,4.7 33.2,4.9 38.7,5.2 42.8,5.2 31,5.6 4,6.2 20.4,6.2 41.6,7.375 10.4,7.6 13.9,7.6 19.3,7.6 6.5,7.7 21.2,8 31.2,8.6 43.6,8.6 28.8,8.7 35,8.9 39.8,8.9 6.6,9.1 3.9,9.2 47.2,9.7 23.9,10 5.4,10.2 7.6,10.3 19.9,10.5 31,10.7 28.7,11.2 6.4,11.4 47.961,11.542 24.3,11.6 35.5,11.9 7.7,12.5 1.531,12.847 4.7,12.9 33.3,13 18.4,13.1 48.1,13.1 20.1,13.3 28.7,13.4 30.9,13.6 36.3,13.7 44.9,13.9 27.5,14 38.9,14.5 29.9,14.6 31.6,14.9 1.6,15 35.3,15 42.4,15.05 48.1,15.05 39.8,15.5 28.747,15.769 33.2,15.8 6.6,15.9 9.2,15.9 41,16.3 43.75,16.3 46.5,16.3 21.4,16.5 4.6,17.5 18.9,17.5 14.2,17.8 16.3,17.8 24.4,17.8 45.7,18 8.9,18.8 44.8,18.8 45.7,18.8 21,18.9 37.2,19.3 7,19.6 35,19.8 47.35,19.95 22,20 28.8,20.5 26.7,20.6 48.2,20.8 17.431,20.853 11.4,21.1 13.8,21.2 20.8,21.2 9.6,21.7 37.8,22.6 39.3,22.6 40.8,22.6 42.3,22.6 27.6,22.7 13.694,22.797 34.9,22.8 19,22.9 24,23 15.2,24.05 28.2,24.5 5.7,25.5 8.5,25.5 20.8,25.5 23.8,25.5 28.2,26.9 5.8,29.2 9.5,29.3 12.9,29.4
  other v3: 2.5,2.5
NetC24_1: C24.1 J2.5 SW_RST.2 U100.7 | length 52.8
  Top Layer w0.127: J2.5 2.054,18.945 2.491,18.508 2.491,15.388 3.1,14.779 3.1,5.075 5.936,2.239 6.007,2.239 6.4,1.846 C24.1 11.275,1.775 SW_RST.2 16.2,3.3 16.2,1.8 17.1,0.9 19.9,0.9 22.8,3.8 22.8,5.8 23.278,6.278 26.278,6.278 27.843,7.843 30.862,7.843 31.159,7.547 U100.7
NetD1_1: D1.1 U1.7 | length 10.8
  Top Layer w0.127: v2(47.6,22.2) D1.1
  Top Layer w0.254: v1(45.5,16.3) U1.7
  Layer 2 w0.127: v1(45.5,16.3) 46.1,15.7 46.925,15.7 47.5,16.275 47.5,19.302 48.61,20.413 48.61,21.189 v2(47.6,22.2)
NetD1_2: D1.2 R7.2 | length 1.3
  Top Layer w0.5: D1.2 49.05,23.05 49.05,24.25 R7.2
NetD2_1: D2.1 U1.9 | length 6.7
  Top Layer w0.127: v2(46.1,22.2) D2.1
  Top Layer w0.254: v2(46.65,17.19) U1.9
  Layer 2 w0.127: v2(46.1,22.2) 46.9,21.4 46.9,17.44 v2(46.65,17.19)
NetD2_2: D2.2 R6.2 | length 1.3
  Top Layer w0.5: R6.2 44.675,24.275 44.675,23.025 D2.2
NetD5_1: D5.1 U100.45 | length 3.8
  Top Layer w0.127: D5.1 29.58,21.82 29.58,21.32 29.754,21.146 29.754,18.846 29.659,18.751 U100.45
NetD5_3: D5.3 U100.44 | length 3.8
  Top Layer w0.127: U100.44 30.142,18.258 30.142,18.806 30.135,18.813 30.135,21.121 30.414,21.399 30.414,21.813 D5.3
NetD5_4: D5.4 J3.2 | length 2.4
  Top Layer w0.127: J3.2 30.016,25.565 30.016,24.819 30.191,24.644 30.191,24.234 30.414,24.011 30.414,23.596 D5.4
NetD5_6: D5.6 J3.3 | length 2.4
  Top Layer w0.127: D5.6 29.587,23.596 29.587,24.011 29.81,24.234 29.81,24.487 29.635,24.662 29.635,25.565 J3.3
NetD6_2: D6.2 J3.1 | length 2.6
  Top Layer w0.254: J3.1 30.898,25.602 30.898,24.902 31.7,24.1 D6.2
NetJ1_1: J1.1 R8.1 U100.51 | length 19.3
  Top Layer w0.127: R8.1 R8.1@11.575,12.4 ; J1.1 12.15,12.975 R8.1@11.575,12.4 ; U100.51 24.5,15.4 20.935,11.835 12.465,11.835 12.197,12.103 11.872,12.103 R8.1@11.575,12.4
NetJ1_2: J1.2 R9.1 U100.52 | length 24.1
  Top Layer w0.127: R9.1@11.429,11.106 10.732,11.803 10.732,14.902 11.721,15.891 12.709,15.891 13.25,15.35 J1.2 ; R9.1 20.906,11.106 24.7,14.9 U100.52
NetJ1_3: J1.3 R10.1 U100.54 | length 32.3
  Top Layer w0.127: J1.3 14.35,15.35 13.4,16.3 11.2,16.3 8.3,13.4 8.3,9.7 9.197,8.803 10.732,8.803 11.429,9.5 R10.1 11.902,9.9 20.4,9.9 24.4,13.9 U100.54
NetJ1_5: J1.5 U100.53 | length 11.2
  Top Layer w0.127: J1.5 16.55,15.35 17.3,16.1 v2(19.3,16.1) ; v1(25.2,14.4) U100.53
  Layer 2 w0.127: v2(19.3,16.1) 21,14.4 v1(25.2,14.4)
NetJ1_7: J1.7 R11.1 U100.39 | length 22.3
  Top Layer w0.127: J1.7 19.037,14.613 19.037,14.163 19.3,13.9 22.4,13.9 23.785,15.285 23.785,18.928 24.039,19.182 24.057,19.182 24.5,19.625 R11.1 24.943,19.255 24.943,18.677 26.923,16.697 26.928,16.697 27.102,16.523 27.102,16.517 27.319,16.3 31.7,16.3 32.659,17.259 U100.39
NetJ1_8: J1.8 R12.1 U100.40 | length 18.4
  Top Layer w0.127: J1.8 19.916,14.966 19.916,15.816 23.103,19.003 23.103,19.601 R12.1 23.2,19.771 23.929,20.5 25.053,20.5 25.406,20.146 25.406,19.153 27.659,16.9 31.305,16.9 32.159,17.753 U100.40
NetJ2_2: J2.2 U100.49 | length 24.5
  Top Layer w0.127: J2.2 5.344,11.325 10.72,16.7 v2(20.1,16.7) ; v2(25.3,16.7) 25.6,16.4 U100.49
  Layer 2 w0.127: v2(20.1,16.7) 20.973,15.827 24.427,15.827 v2(25.3,16.7)
NetJ2_4: J2.4 U100.46 | length 30.1
  Top Layer w0.127: J2.4 5.344,16.405 5.781,16.841 5.781,16.881 10.972,22.072 25.085,22.072 26.11,21.047 26.11,19.383 28.036,17.457 28.862,17.457 29.159,17.753 U100.46
NetJ2_6: J2.6 U100.55 | length 37.1
  Top Layer w0.127: J2.6 4.434,21.485 3.744,20.794 3.744,10.746 6.09,8.4 19.6,8.4 24.6,13.4 U100.55
NetR1_2: R1.2 U1.1 | length 7.4
  Top Layer w0.127: R1.2 37.125,20.55 38.525,19.15 U1.1
NetR2_1: R2.1 U1.16 | length 6.3
  Top Layer w0.127: R2.1 38.577,20.623 39.4,19.8 U1.16
NetR3_1: R3.1 U1.14 | length 5.2
  Top Layer w0.127: R3.1 41.577,20.623 42.097,21.143 44.857,21.143 45.5,20.5 U1.14
NetR4_1: R4.1 U1.15 | length 2.5
  Top Layer w0.127: R4.1 44.477,20.623 44.978,20.122 44.978,19.822 U1.15
NetR5_1: R5.1 U1.12 | length 8.6
  Top Layer w0.127: R5.1 40.077,20.623 40.91,21.457 45.257,21.457 v2(45.3,21.5) ; v2(46.5,19.8) 46.5,19.202 46.552,19.15 U1.12
  Layer 2 w0.127: v2(45.3,21.5) 46.5,20.3 v2(46.5,19.8)
NetR13_2: R13.2 U4.4 U100.8 | length 12.5
  Top Layer w0.127: U4.4 27.973,3.526 R13.2@32.874,3.526 ; U100.8 31.659,4.741 32.5,3.9 32.838,3.9 32.874,3.865 R13.2@32.874,3.526 ; R13.2 R13.2@32.874,3.526
NetR14_2: R14.2 U4.3 U100.9 | length 16.6
  Top Layer w0.127: U4.3 25,5.3 28.174,2.126 33.675,2.126 33.9,2.351 33.9,4.001 33.601,4.3 32.8,4.3 32.159,4.941 U100.9
NetR15_1: R15.1 U100.60 | length 6.9
  Top Layer w0.127: R15.1 22.834,8.716 22.284,8.716 22.1,8.9 22.1,10.494 22.506,10.9 U100.60
NetR16_1: R16.1 R17.1 U100.42 | length 4.9
  Top Layer w0.127: U100.42 31.159,19.784 32.5,21.125 R16.1
  Top Layer w0.254: R16.1 R17.1
NetU3_1: U3.1 U100.22 | length 10.4
  Top Layer w0.127: U100.22 36.7,11.4 36.2,10.9 36.2,8.3 37.9,6.6 39.1,6.6 40.05,5.65 U3.1
NetU3_2: U3.2 U100.23 | length 12.2
  Top Layer w0.127: U100.23 36.4,11.9 35.6,11.1 35.6,8.1 37.7,6 38.8,6 39.542,5.258 39.542,3.924 39.616,3.849 40.001,3.849 U3.2
NetU3_5: U3.5 U100.16 | length 9.8
  Top Layer w0.127: U100.16 35.659,4.041 38.3,1.4 39.5,1.4 40.575,2.475 U3.5
NetU3_10: U3.10 U100.17 | length 7
  Top Layer w0.127: U100.17 37.583,8.9 37.622,8.861 37.622,8.678 38.4,7.9 39.6,7.9 41.6,5.9 U3.10
NetU3_12: U3.12 U100.21 | length 9.5
  Top Layer w0.127: U100.21 36.989,10.9 36.715,10.626 36.715,9.985 36.715,9.777 36.715,8.685 38.154,7.246 39.354,7.246 40.575,6.025 U3.12
NetU5_1: U5.1 U100.36 | length 21.7
  Top Layer w0.127: U5.1 19.69,4.557 19.836,4.704 20.104,4.704 23,7.6 26,7.6 34.159,15.759 U100.36
NetU5_4: U5.4 U100.34 | length 23.7
  Top Layer w0.127: U5.4 19.236,3.491 19.236,3.683 19.505,3.952 20.252,3.952 23.3,7 26.2,7 35.159,15.959 U100.34
NetU6_1: U6.1 U100.59 | length 13.3
  Top Layer w0.127: U100.59 26.345,11.428 26.833,11.428 27.488,12.083 27.675,12.083 v2(27.727,12.135)
  Bottom Layer w0.127: U6.1 19.65,9.15 20.911,10.41 26.328,10.41 26.6,10.682 26.6,11.4 27.335,12.135 v2(27.727,12.135)
NetU6_2: U6.2 U100.58 | length 8.8
  Top Layer w0.127: v2(25.2,12.1) 25.274,12.1 25.474,11.9 U100.58
  Bottom Layer w0.127: U6.2 18.551,11.69 18.961,12.1 v2(25.2,12.1)
NetU6_10: U6.10 U100.57 | length 8.1
  Top Layer w0.127: U100.57 26.805,12.4 27.253,12.848 27.448,12.848 v2(27.5,12.9)
  Bottom Layer w0.127: v2(27.5,12.9) 27.8,12.9 28.3,12.4 30.67,12.4 32.5,14.23 U6.10
VBAT: C5.2 J9.2 U1.2 U1.3 | length 10.1
  Top Layer w0.5: C5.2@41.975,17.8 C5.2@42.4,18.225
  Layer 2 w0.5: v2(40.9,17.8) v2(40.9,18.5) 40.2,19.2 40.2,25.191 41.25,26.241 J9.2
VBUS: C3.1 D5.5 D6.1 R16.2 U1.13 | length 20.4
  Top Layer w0.127: D5.5 30.001,23.509 30.001,22.899 30.195,22.705 32.403,22.705 R16.2
  Top Layer w0.254: R16.2@32.5,22.875 32.879,23.254 32.952,23.254 33.14,23.442 33.14,23.821 33.419,24.1 D6.1 42.3,24.1 44.3,22.1 45.5,22.1 46.073,21.527 C3.1 46.007,20.734 46.007,19.807 U1.13
VCC: C2.1 C4.2 R6.1 R7.1 U1.5 U1.10 U1.11 U2.2 U2.4 | length 30.5
  Top Layer w0.127: v2(44.5,16.3) U1.5
  Top Layer w0.254: C4.2 v2(48.1,19.35)
  Top Layer w0.5: U2.2 45.586,11.539 45.586,11.939 45.987,12.34 45.987,13.014 46.109,13.136 46.109,13.909 46.5,14.3 48.5,14.3 49.5,15.3 49.5,17.8 49.2,18.1 48.325,18.1 48.225,18 C4.2 ; v2(46.15,25.25) R6.1 R7.1
  Layer 2 w0.127: v2(44.5,16.3) 45.75,15.05 47.25,15.05 48.1,15.9 v2(48.1,19.35)
  Layer 2 w0.254: v2(46.15,25.25) 49,22.4 49,20.25 v2(48.1,19.35)
pads on no net: J1.CD J3.4 J3.S1 J3.S2 J3.S3 J3.S4 J3.S5 J3.S6 U3.4 U3.6 U3.11 U5. U6.6 U6.7 U6.8 U6.9 U6.11 U100.2 U100.3 U100.4 U100.5 U100.6 U100.10 U100.11 U100.14 U100.15 U100.20 U100.24 U100.25 U100.26 U100.27 U100.28 U100.29 U100.30 U100.33 U100.35 U100.37 U100.38 U100.41 U100.43 U100.50 U100.56 U100.61 U100.62
copper on no net:
  other v3: 47.5,2.5 2.5,27.5 47.5,27.5

## Polygon pours and split planes (outlines as drawn)
GND on Top Layer "GND_L01_P008" (solid, pour order 8): 0,30 50,30 50,0 0,0
VBAT on Top Layer "VBAT_L01_P007" (solid, pour order 7): 44.1,18.8 44.2,18.7 44.2,18.1 44.1,18 43.5,18 42.9,17.4 40.5,17.4 40.3,17.6 40.3,18.7 40.4,18.8
VCC on Top Layer "VCC_L01_P002" (solid, pour order 2): 46.45,18.8 46.35,18.7 46.35,18.1 46.45,18 47.05,18 47.65,17.4 48.875,17.4 48.875,18.8
+3.3V on Top Layer "+3.3V_L01_P005" (solid, pour order 5): 40.5,9.8 40.775,9.525 43.525,9.525 44.5,10.5 44.5,12 44.1,12.4 44.1,13.4 44,13.5 41.8,13.5 40.5,12.2
GND on Layer 1 "GND_L02_P011" (solid, pour order 11): 0,30 50,30 50,0 0,0
+3.3V on Layer 2 "+3.3V_L03_P012" (solid, pour order 12): 0,30 50,30 50,0 0,0
GND on Bottom Layer "GND_L04_P013" (solid, pour order 13): 0,30 50,30 50,0 0,0

## Other copper
Top Layer:
  pour cut-out: 11.2,16.3 8.3,13.4 8.3,11.55 8.45,11.4 15.5,11.4 16.357,16.651
  pour cut-out: 25,21.8 25,18.619 27.319,16.3 31.7,16.3 32.659,17.259 32.659,17.65 27.842,17.65 26.11,19.383 26.11,21.047
  pour cut-out: 12.208,12.206 10.978,10.975 10.978,8.594 19.52,8.594 21.007,10.081 21.007,11.648 14.252,11.648 13.694,12.206
  pour cut-out: 19.772,4.64 19.772,4.058 19.879,3.952 20.252,3.952 22.6,6.3 22.622,6.278 26.278,6.278 27.843,7.843 27.659,8.028 27.659,8.459 35.159,15.959 35.159,17.65 34.159,17.65 34.159,15.759 26,7.6 22.936,7.6 20.04,4.704
  pour cut-out: 35.6,10.9 36.2,10.9 36.2,8.4 36.7,7.9 39.6,7.9 41.6,5.9 41.6,4.85 41.35,4.6 40,4.6 40,4.8 38.9,5.9 37.8,5.9 35.6,8.1
  pour cut-out: 37.65,20.294 37.777,20.167 38.758,20.167 44.251,20.167 44.251,19.507 44.088,19.344 38.605,19.344
Layer 2:
  pour cut-out: 44.5,16.3 45.5,16.3 46.1,15.7 46.925,15.7 47.5,16.275 47.5,19.302 47.779,19.023 48.035,19.023 48.035,15.965 48.1,15.9 47.25,15.05 45.75,15.05

## Text inside footprints (layer, text, board x,y; h text height)
U4: Top 3D Body "*" at 23.299,6.646 h1.27; Top Overlay "*" at 22.233,6.646 h1.27